# EAGLE board Controller SMD UNO v1.0 (EAGLE 6.4)
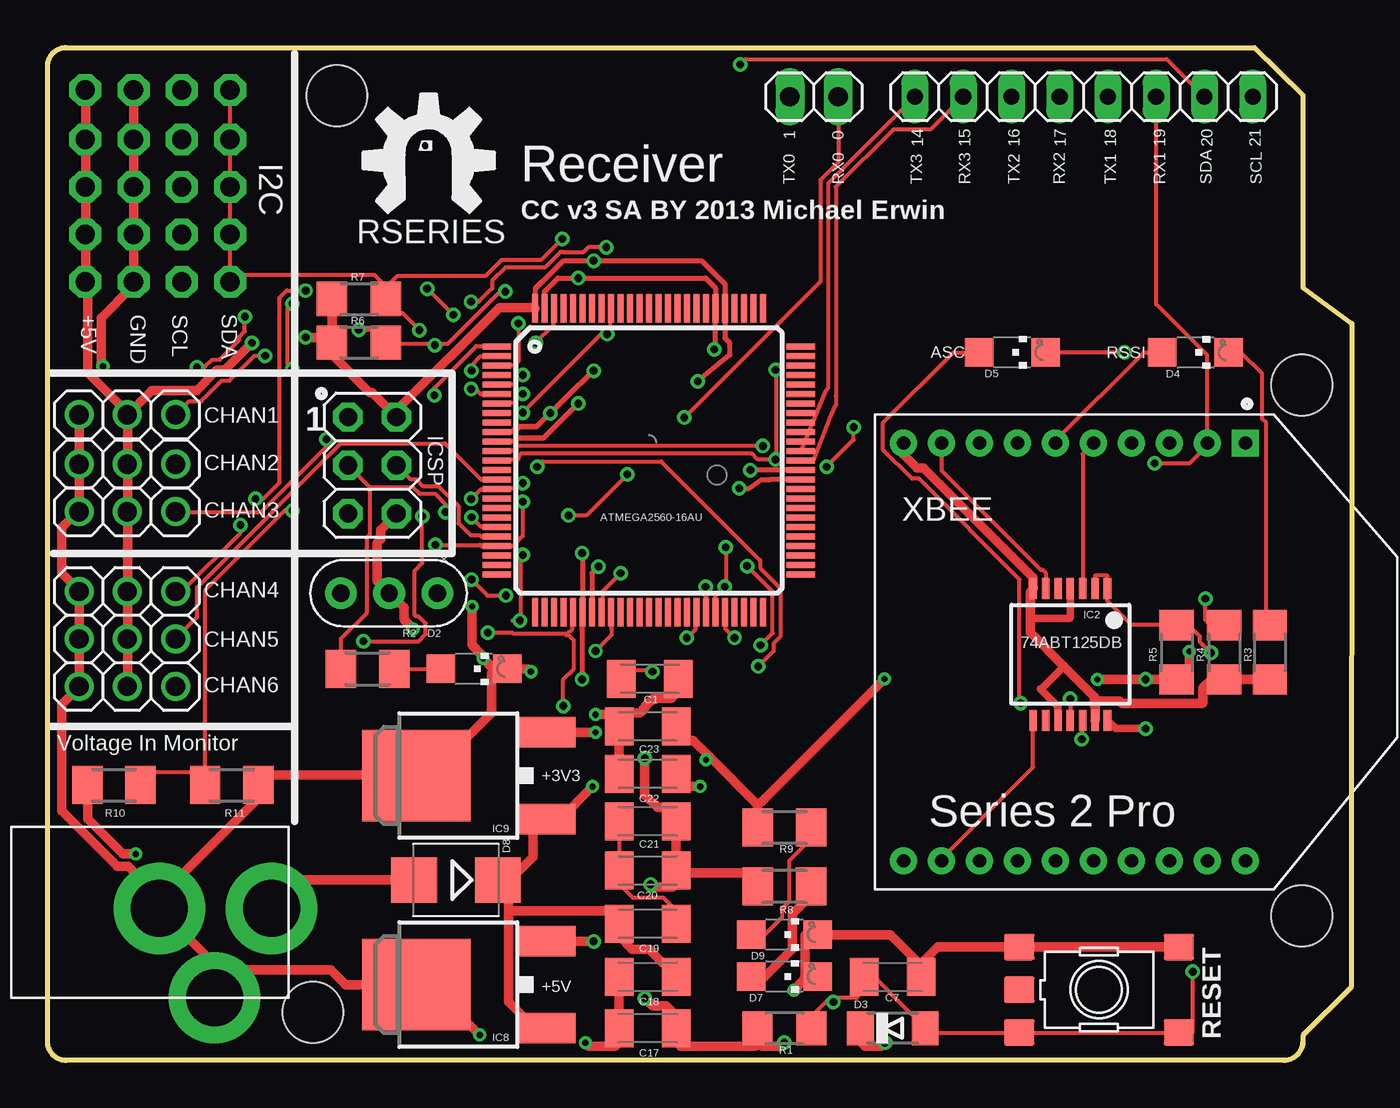
[diagram p0: board, top side]
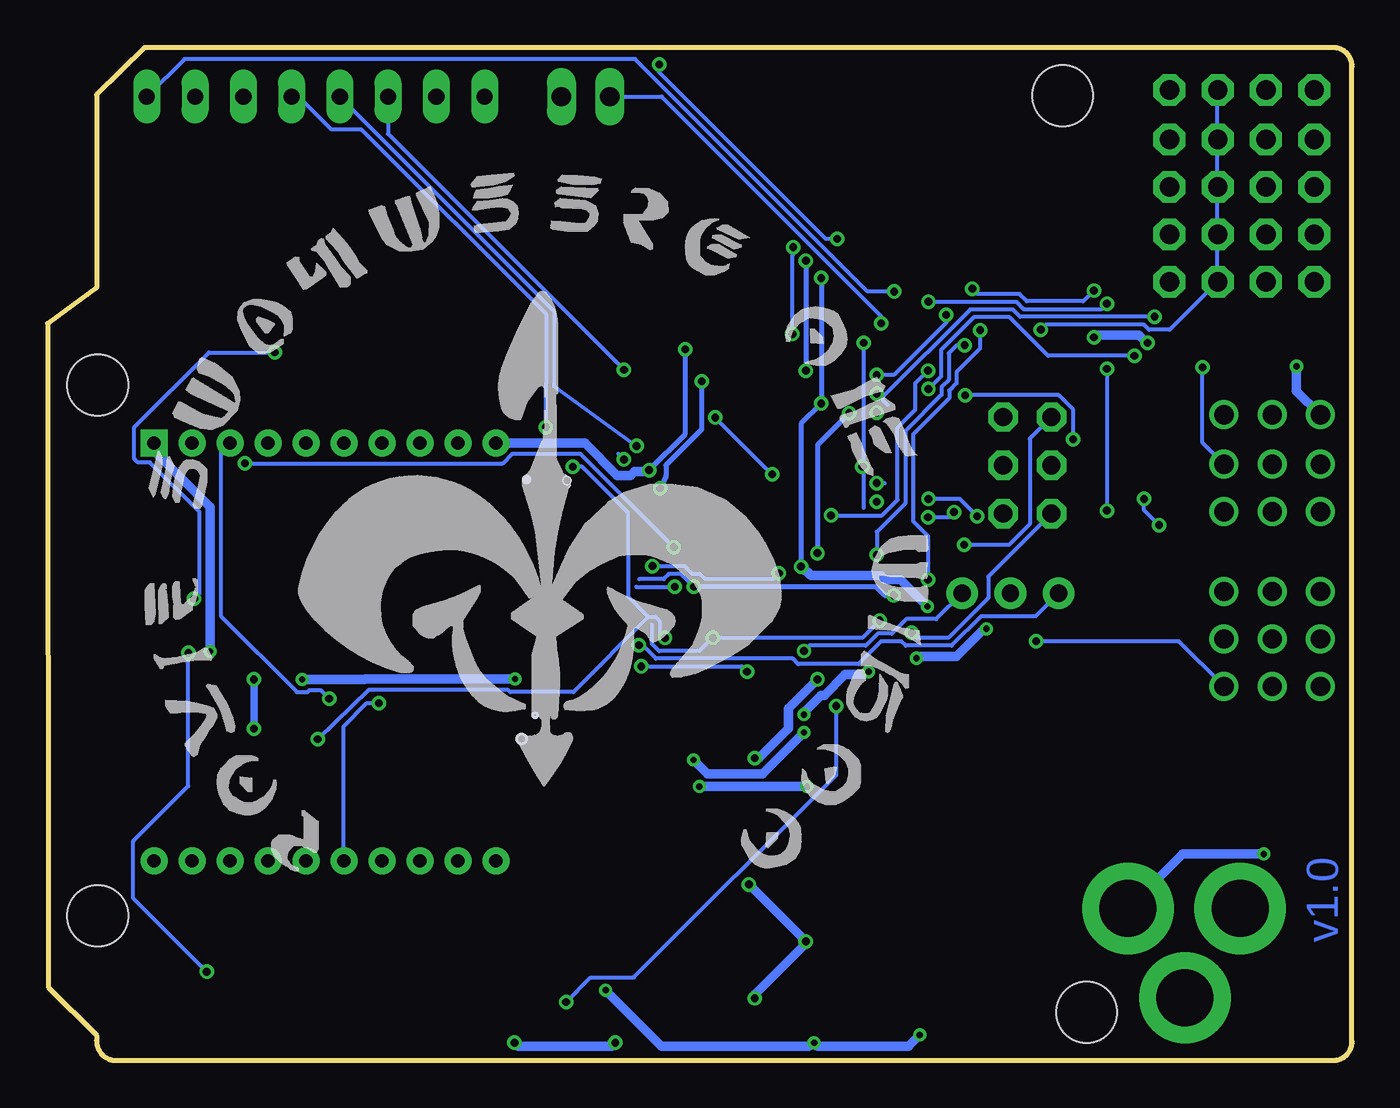
[diagram p1: board, bottom side, seen from below]

Size 68.68 x 53.34 mm. Coordinates in mm from the lower left corner, seen from the top.
Outline: 63.55,53.34 66.09,50.85 66.09,40.69 68.68,38.81 68.63,3.86 66.09,1.32 66.09,1.05 arc-90 65.09,0 1,0 arc-90 0,1 0,52.34 arc-90 1,53.34 63.55,53.34
Copper layers (1*16): Top 0.0356mm / dielectric 1.5011mm / Bottom 0.0356mm
Design rules "LaenPCBOrder *": minimum track width 6mil, minimum drill 13mil, track to track 6mil, track to pad 6mil, pad to pad 6mil, via to via 6mil, smd to smd 6mil, copper to edge 15mil, drill to drill 6mil, minimum pad ring 7mil, minimum via ring 7mil, stop-mask expansion 4mil, vias tented up to drill 16mil, thermal gap 10mil
Net classes: 0 default: width 0.203 mm, drill 0.406 mm, clearance 0.203 mm; 1 supply: width 0.508 mm, drill 0.152 mm, clearance 0.152 mm; 2 GND: width 0.508 mm, drill 0.305 mm, clearance 0.152 mm; 3 power usb: width 0.508 mm, drill 0.406 mm, clearance 0.203 mm
Holes 3.2 mm at 15.24,50.8 13.97,2.54 66.04,35.56 66.04,7.62

## Footprints (pad centres in the part's own frame; a part is rotated, then mirrored left to right if it is on the bottom)
C1206K = smd 1.5 x 2: 1 -1.5,0; 2 1.5,0
1X03 = drill 1.016: 1 -2.54,0; 2 0,0; 3 2.54,0
1X08 = drill 0.85 pad 1.422 long: 1 -8.89,0; 2 -6.35,0; 3 -3.81,0; 4 -1.27,0; 5 1.27,0; 6 3.81,0; 7 6.35,0; 8 8.89,0
CHIPLED_1206 = smd 1.5 x 1.5: A 0,-1.75; C 0,1.75
MINIMELF = smd 1.4 x 1.8: A 1.7,0; C -1.7,0
SMB = smd 2.4 x 2.4: A 2.2,0; C -2.2,0
1X04-CB = drill 1.016 pad 1.676 octagon: 1 -3.81,0; 2 -1.27,0; 3 1.27,0; 4 3.81,0
SSOP14 = smd 0.4 x 1.1: 1 -1.95,-3.475; 2 -1.3,-3.475; 3 -0.65,-3.475; 4 0,-3.475; 5 0.65,-3.475; 6 1.3,-3.475; 7 1.95,-3.475; 8 1.95,3.475; 9 1.3,3.475; 10 0.65,3.475; 11 0,3.475; 12 -0.65,3.475; 13 -1.3,3.475; 14 -1.95,3.475
TQFP100 = smd 1.5 x 0.3: 1 -8,6; 2 -8,5.5; 3 -8,5; 4 -8,4.5; 5 -8,4; 6 -8,3.5; 7 -8,3; 8 -8,2.5; 9 -8,2; 10 -8,1.5; 11 -8,1; 12 -8,0.5; 13 -8,0; 14 -8,-0.5; 15 -8,-1; 16 -8,-1.5; 17 -8,-2; 18 -8,-2.5; 19 -8,-3; 20 -8,-3.5; 21 -8,-4; 22 -8,-4.5; 23 -8,-5; 24 -8,-5.5; 25 -8,-6; 51 8,-6; 52 8,-5.5; 53 8,-5; 54 8,-4.5; 55 8,-4; 56 8,-3.5; 57 8,-3; 58 8,-2.5; 59 8,-2; 60 8,-1.5; 61 8,-1; 62 8,-0.5; 63 8,0; 64 8,0.5; 65 8,1; 66 8,1.5; 67 8,2; 68 8,2.5; 69 8,3; 70 8,3.5; 71 8,4; 72 8,4.5; 73 8,5; 74 8,5.5; 75 8,6 | smd 0.3 x 1.5: 26 -6,-8; 27 -5.5,-8; 28 -5,-8; 29 -4.5,-8; 30 -4,-8; 31 -3.5,-8; 32 -3,-8; 33 -2.5,-8; 34 -2,-8; 35 -1.5,-8; 36 -1,-8; 37 -0.5,-8; 38 0,-8; 39 0.5,-8; 40 1,-8; 41 1.5,-8; 42 2,-8; 43 2.5,-8; 44 3,-8; 45 3.5,-8; 46 4,-8; 47 4.5,-8; 48 5,-8; 49 5.5,-8; 50 6,-8; 76 6,8; 77 5.5,8; 78 5,8; 79 4.5,8; 80 4,8; 81 3.5,8; 82 3,8; 83 2.5,8; 84 2,8; 85 1.5,8; 86 1,8; 87 0.5,8; 88 0,8; 89 -0.5,8; 90 -1,8; 91 -1.5,8; 92 -2,8; 93 -2.5,8; 94 -3,8; 95 -3.5,8; 96 -4,8; 97 -4.5,8; 98 -5,8; 99 -5.5,8; 100 -6,8
DPAK = smd 1.6 x 3: 1 -2.28,-5.31; 3 2.28,-5.31 | smd 4.826 x 5.715: 4 0,1.588
2X03 = drill 0.95 pad 1.55 octagon: 1 -2.54,-1.27; 2 -2.54,1.27; 3 0,-1.27; 4 0,1.27; 5 2.54,-1.27; 6 2.54,1.27
PJ-102A = drill 3 pad 4.8: RING 0.1,-3.39; RING_SW -4.6,-6.29; TIP 0.1,-9.29
1X02 = drill 1.016 long: 1 -1.27,0; 2 1.27,0
R1206 = smd 1.6 x 1.803: 1 -1.422,0; 2 1.422,0
M1206 = smd 1.6 x 2: 1 -1.4,0; 2 1.4,0
TS42 = smd 1.6 x 1.4: 1 -4.2,2.25; 2 4.2,2.25; 3 -4.2,-2.25; 4 4.2,-2.25; 5 -4.2,0
CERM_OSC = drill 0.9 pad 1.676: P$1 -2.54,0; P$2 0,0; P$3 2.54,0
XBEE = drill 0.7 pad 1.422 square: 1 -11,5.5 | drill 0.7 pad 1.422: 2 -11,3.5; 3 -11,1.5; 4 -11,-0.5; 5 -11,-2.5; 6 -11,-4.5; 7 -11,-6.5; 8 -11,-8.5; 9 -11,-10.5; 10 -11,-12.5; 11 11,-12.5; 12 11,-10.5; 13 11,-8.5; 14 11,-6.5; 15 11,-4.5; 16 11,-2.5; 17 11,-0.5; 18 11,1.5; 19 11,3.5; 20 11,5.5

## Placement (x,y rotation side)
C1  0.1uF  [C1206K]  31.7,20.1 0 top
C7  22p  [C1206K]  44.5,4.4 0 top
C17  0.1uF  [C1206K]  31.6,1.7 180 top
C18  0.1uF  [C1206K]  31.6,4.4 180 top
C19  10uf 25V  [C1206K]  31.6,7.2 0 top
C20  10uf 25V  [C1206K]  31.6,10 180 top
C21  0.1uF  [C1206K]  31.6,12.6 180 top
C22  10uf 25V  [C1206K]  31.6,15.1 180 top
C23  0.1uF  [C1206K]  31.6,17.6 180 top
CHAN1  [1X03]  4.2,34 180 top
CHAN2  [1X03]  4.2,31.4 180 top
CHAN3  [1X03]  4.2,28.9 180 top
CHAN4  [1X03]  4.2,24.7 180 top
CHAN5  [1X03]  4.2,22.2 180 top
CHAN6  [1X03]  4.2,19.7 180 top
COMMUNICATION  8x1F-H8.5  [1X08]  54.56,50.75 180 top
D2  RED  [CHIPLED_1206]  22.45,20.62 270 top
D3  CD1206-S01575  [MINIMELF]  44.5,1.7 0 top
D4  [CHIPLED_1206]  60.44,37.28 270 top
D5  [CHIPLED_1206]  50.79,37.3 270 top
D7  [CHIPLED_1206]  38.8,4.43 270 top
D8  [SMB]  21.5,9.5 180 top
D9  [CHIPLED_1206]  38.8,6.64 270 top
I2C  [1X04-CB]  5.8,51.1 180 top
I2C1  [1X04-CB]  5.8,48.5 180 top
I2C2  [1X04-CB]  5.8,46 180 top
I2C3  [1X04-CB]  5.8,43.5 180 top
I2C4  [1X04-CB]  5.8,41 180 top
IC2  74ABT125DB  [SSOP14]  53.85,21.39 180 top
IC3  ATMEGA2560-16AU  [TQFP100]  31.66,31.59 0 top
IC8  LM2931_FIXED  [DPAK]  21,4 90 top
IC9  LM2931_FIXED  [DPAK]  21,15 90 top
ICSP  3x2M  [2X03]  17.1,31.34 270 top
J2  2.1MMJACK  [PJ-102A]  2.5,7.9 90 top
JP1  [1X02]  40.35,50.75 180 top
R1  10K  [R1206]  38.8,1.7 0 top
R2  1.0 K  [M1206]  16.85,20.62 180 top
R3  1K  [R1206]  64.35,21.49 90 top
R4  1K  [R1206]  61.95,21.49 90 top
R5  10K  [R1206]  59.45,21.49 90 top
R6  10K  [R1206]  16.4,37.8 180 top
R7  10K  [R1206]  16.4,40.1 180 top
R8  1.0 K  [M1206]  38.8,9.16 0 top
R9  1.0 K  [M1206]  38.8,12.27 0 top
R10  47.0 K  [M1206]  3.5,14.5 180 top
R11  24.0 K  [M1206]  9.7,14.5 180 top
RESET  TS42031-160R-TR-7260  [TS42]  55.37,3.73 0 top
U$1  ROYAL-ENGINEERS-OF-NABOO  [ROYAL-ENGINEERS-OF-NABOO]  63.96,8.64 0 bottom
U$3  RSERIES-OSHW-LOGO  [RSERIES-OSHW-LOGO-LARGE]  20.07,47.4 0 top
X1  16.00MHz  [CERM_OSC]  17.99,24.61 0 top
XBEE  XBEE  [XBEE]  57.58,21.52 270 top

## Library data of the parts
C1 C17 C18 C21 C23 D2 D4 D5 D7 D9 J2 R2 R8-R11 = minimidi
C7 COMMUNICATION IC3 ICSP RESET = SmartPrj
C19 C20 C22 = rcl
CHAN1-CHAN6 = adafruit3
D3 D8 = diode
I2C I2C1-I2C4 = carduino
IC2 = 74xx-us
IC8 IC9 = SparkFun-PowerIC
JP1 = pinhead
R1 R3-R7 = rcl-ez
U$1 U$3 = rseries
X1 = digg
XBEE = ulink

## Nets
5-GND: RESET.5
+5V [power usb]: C17.1 C20.1 C21.1 CHAN1.2 CHAN2.2 CHAN3.2 CHAN4.2 CHAN5.2 CHAN6.2 D3.C I2C1.4 I2C2.4 I2C3.4 I2C4.4 I2C.4 IC3.10 IC3.31 IC3.61 IC3.80 IC3.100 IC8.3 ICSP.2 R1.1 R6.2 R7.2 R8.1
+9V [supply]: C18.1 C19.1 C22.1 D8.C IC8.1 IC9.1
ADC0: IC3.97
ADC1: IC3.96
ADC2: IC3.95
ADC3: IC3.94
ADC4: IC3.93
ADC5: IC3.92 R10.1 R11.2
ADC6: IC3.91
ADC7: IC3.90
ADC8: IC3.89
ADC9: IC3.88
ADC10: IC3.87
ADC11: IC3.86
ADC12: IC3.85
ADC13: IC3.84
ADC14: IC3.83
ADC15: IC3.82
AREF: C1.1 IC3.98
GND [GND]: C1.2 C7.2 C17.2 C18.2 C22.2 C23.2 CHAN1.3 CHAN2.3 CHAN3.3 CHAN4.3 CHAN5.3 CHAN6.3 D2.C D7.C D9.C I2C1.3 I2C2.3 I2C3.3 I2C4.3 I2C.3 IC2.4 IC2.7 IC2.10 IC2.13 IC3.11 IC3.32 IC3.62 IC3.81 IC3.99 IC8.4 IC9.4 ICSP.6 J2.RING J2.RING_SW R3.1 R4.1 R11.1 RESET.1 RESET.2 X1.P$2 XBEE.10
N$4: IC2.11 XBEE.3
N$5: D5.C R4.2
N$6: IC2.5
N$7: D4.A XBEE.6
N$8: D4.C R3.2
N$9: D9.A R9.2
N$10: IC2.6 XBEE.9
N$11: D2.A R2.1
N$13: IC2.3 XBEE.5
N$21: IC2.9
N$22: IC2.8 XBEE.12
N$23: D5.A XBEE.15
N$28 [supply]: D7.A R8.2
N$29 [supply]: D8.A J2.TIP R10.2
N$30: C19.2 C20.2 C21.2
PA0: IC3.78
PA1: IC3.77
PA2: IC3.76
PA3: IC3.75
PA4: IC3.74
PA5: IC3.73
PA6: IC3.72
PA7: IC3.71
PB0: IC3.19
PB1: IC3.20 ICSP.3 R2.2
PB2: IC3.21 ICSP.4
PB3: IC3.22 ICSP.1
PB4: IC3.23
PB5: IC3.24
PB6: IC3.25
PB7: IC3.26
PC0: IC3.53
PC1: IC3.54
PC2: IC3.55
PC3: IC3.56
PC4: IC3.57
PC5: IC3.58
PC6: IC3.59
PC7: IC3.60
PD7: IC3.50
PE0: IC3.2 JP1.1
PE1: IC3.3 JP1.2
PE3: CHAN4.1 IC3.5
PE4: CHAN1.1 IC3.6
PE5: CHAN2.1 IC3.7
PG0: IC3.51
PG1: IC3.52
PG2: IC3.70
PG5: CHAN3.1 IC3.1
PH3: CHAN5.1 IC3.15
PH4: CHAN6.1 IC3.16
PH5: IC3.17
PH6: IC3.18
PL0: IC3.35
PL1: IC3.36
PL2: IC3.37
PL3: IC3.38
PL4: IC3.39
PL5: IC3.40
PL6: IC3.41
PL7: IC3.42
RESET: C7.1 D3.A IC2.1 IC2.2 IC3.30 ICSP.5 R1.2 R5.2 RESET.3 RESET.4
RTS: XBEE.16
RXD1: COMMUNICATION.3 IC3.45 XBEE.2
RXD2: COMMUNICATION.5 IC3.12
RXD3: COMMUNICATION.7 IC3.63
SCL: COMMUNICATION.1 I2C1.2 I2C2.2 I2C3.2 I2C4.2 I2C.2 IC3.43 R6.1
SDA: COMMUNICATION.2 I2C1.1 I2C2.1 I2C3.1 I2C4.1 I2C.1 IC3.44 R7.1
TXD1: COMMUNICATION.4 IC2.12 IC3.46
TXD2: COMMUNICATION.6 IC3.13
TXD3: COMMUNICATION.8 IC3.64
VCC [supply]: C23.1 IC2.14 IC9.3 R5.1 R9.1 XBEE.1
XTAL1: IC3.34 X1.P$3
XTAL2: IC3.33 X1.P$1

## Tracks (layer width: path | path; a pad name or v marks a point on that pad's centre or on a via)
+5V  (via drill 0.41)
  Top 0.203: IC3.10 24.46,33.09 24.49,33.12
  Top 0.254: IC3.61 38.02,30.58 37.59,30.58 36.93,30.12 v36.42,30.12 | v34.24,35.76 34.59,36.07 35.92,37.13 35.92,37.8 35.66,38.05 IC3.80 35.66,40.89 34.44,42.11 v28.75,42.11 | 25.7,39.63 IC3.100 25.7,39.63 | 25.7,39.63 25.7,40.64 | 25.7,40.64 25.7,40.69 27.18,42.11 | 27.18,42.11 27.23,42.11 | 27.23,42.11 v28.75,42.11 | 25.7,39.63 25.7,40.64 | 25.7,40.64 27.18,42.11 | 27.18,42.11 27.23,42.11 | 27.23,42.11 v28.75,42.11 | v28.75,36.32 25.76,33.38 | 25.76,33.38 24.84,33.38 24.56,33.09 | 24.49,33.12 24.74,33.38 25.76,33.38 | 25.76,33.38 v26.47,34.09 | v28.14,26.72 28.16,26.7 IC3.31 28.14,23.57 28.14,22.71 v28.14,20.07
  Top 0.508: I2C.4 2.01,51.08 2.01,48.74 I2C1.4 2.01,48.49 2.01,46.25 I2C2.4 2.01,46 2.01,43.74 I2C3.4 2.01,43.48 2.01,41.02 I2C4.4 2.11,40.77 2.11,36.22 4.09,34.24 CHAN1.2 | CHAN6.2 4.22,19.71 4.22,22.2 CHAN5.2 4.22,22.45 4.22,24.69 CHAN4.2 4.22,24.94 4.22,28.65 CHAN3.2 4.22,28.91 4.22,31.39 CHAN2.2 4.22,31.65 4.22,33.98 CHAN1.2 | R6.2 14.99,37.82 14.99,40.08 R7.2 | R6.2 14.99,37.54 14.99,37.16 16.97,35.18 17.09,35.18 18.39,33.88 ICSP.2 18.39,34.24 23.8,39.65 25.55,39.65 IC3.100 | v44.09,0.94 43.92,0.76 43.03,0.76 42.8,0.99 42.8,1.68 D3.C | v38.79,0.94 38.61,0.76 37.62,0.76 37.44,0.94 | 37.44,0.94 37.39,0.99 37.39,1.68 R1.1 | 37.44,0.94 37.26,0.76 33.33,0.76 33.1,0.99 33.1,1.68 C17.1 33.1,1.96 33.1,2.34 32.56,2.87 31.85,2.87 v31.45,3.28 | C20.1 C21.1 33.1,12.85 33.1,13.31 33.07,13.34 32.11,13.34 31.45,13.99 v31.45,15.93 | R8.1 37.39,9.8 37.31,9.88 33.33,9.88 C20.1 | v28.75,6.27 IC8.3 | v31.75,9.27 31.88,9.14 32.94,9.14 33.1,9.3 33.1,9.73 C20.1 | v10.77,37.8 9.32,36.35 8.91,36.35 7.85,35.28 5.49,35.28 4.57,34.37 4.32,34.37 CHAN1.2 | v13.59,38.08 14.76,38.08 R6.2
  Bottom 0.254: v34.24,35.76 34.24,33.22 36.12,31.34 36.12,30.79 v36.42,30.12 | v28.75,42.11 v28.75,36.32 | v26.47,34.09 28.14,32.41 v28.14,26.72
  Bottom 0.508: v44.09,0.94 43.92,0.76 38.96,0.76 v38.79,0.94 | v31.75,9.27 v28.75,6.27 28.88,6.04 31.45,3.48 v31.45,3.28 | v28.14,20.07 29.67,18.54 29.67,17.48 31.22,15.93 v31.45,15.93 | v10.77,37.8 10.82,37.8 11.23,38.2 13.46,38.2 v13.59,38.08
+9V  (via drill 0.33)
  Top 0.508: C18.1 33.1,4.42 33.1,5.11 33.07,5.13 32.41,5.13 31.67,5.87 30.79,5.87 30.1,6.55 30.1,7.19 C19.1 30.1,7.44 30.1,7.85 30.07,7.87 24.51,7.87 24.28,7.87 | v34.37,14.43 33.12,14.43 33.1,14.45 33.1,15.09 C22.1 | v28.7,14.43 27,12.72 IC9.1 26.06,12.72 25.6,12.72 25.58,12.7 25.58,10.72 24.36,9.5 23.72,9.5 D8.C 24.28,9.27 24.28,7.87 | 24.28,7.87 24.28,3.1 25.65,1.73 26.29,1.73 IC8.1
  Bottom 0.508: v28.7,14.43 v34.37,14.43
ADC5  (via drill 0.41)
  Top 0.203: v25.02,34.11 29.31,38.41 | 29.31,38.41 29.64,38.73 29.64,38.94 29.67,38.96 29.67,39.57 IC3.92 | R10.1 4.9,15.14 4.93,15.16 8.28,15.16 8.31,15.14 R11.2 8.28,15.24 8.28,24.74 12.5,28.96 v12.9,28.96 | v12.9,36.42 12.62,36.7 12.62,39.57 v12.9,39.85 | v22.3,39.95 22.71,39.95 23.42,40.66 23.42,41.07 24.11,41.76 26.19,41.76 27,42.57 27.18,42.57 27.2,42.55 28.19,42.55 28.47,42.82 v29.41,42.82 | v29.46,38.25 29.36,38.35 29.31,38.41
  Bottom 0.203: v12.9,36.42 v12.9,28.96 | v12.9,39.85 13.18,39.57 17.3,39.57 17.68,39.95 v22.3,39.95 | v29.41,42.82 29.41,42.44 29.46,42.39 v29.46,38.25
AREF  (via drill 0.41)
  Top 0.203: v25.7,37.8 26.64,38.73 26.64,38.94 26.67,38.96 26.67,39.57 IC3.98 | v31.85,20.47 31.77,20.55 30.2,20.55 30.2,20.12 C1.1 | v37.41,20.75 38.23,21.57 38.23,21.97 38.58,22.33 38.58,24.87 37.52,25.93 37.52,26.34 32.31,31.55 26.06,31.55 v25.78,31.27
  Bottom 0.203: 25.7,29.11 25.7,31.27 | 25.7,31.27 v25.7,37.8 | v31.85,20.47 32.13,20.75 v37.41,20.75 | v25.78,31.27 25.7,31.27
GND  (via drill 0.33, 0.41)
  Top 0.203: IC3.11 24.41,32.59 24.43,32.61
  Top 0.254: IC3.62 v37.01,31.09 | v35.1,37.44 35.16,37.5 IC3.81 35.16,40.68 34.65,41.2 v27.94,41.2 | IC3.99 | IC3.99 26.16,40.49 | 26.16,40.49 26.87,41.2 | 26.87,41.2 v27.94,41.2 | IC3.99 26.16,40.49 | 26.16,40.49 26.87,41.2 | 26.87,41.2 v27.94,41.2 | 26.11,32.77 v27.94,34.59 26.11,32.77 | 26.11,32.77 26.01,32.77 | 26.01,32.77 24.89,32.77 24.74,32.77 | 24.74,32.77 24.59,32.61 | 24.59,32.61 24.57,32.59 | 24.43,32.61 24.59,32.61 | 24.59,32.61 24.74,32.77 | 24.74,32.77 26.01,32.77 | 26.01,32.77 26.11,32.77 | v29.01,26.01 28.66,25.67 IC3.32
  Top 0.406: IC2.10 53.2,18.63 52.27,19.56 52.32,19.56 53.52,20.75 | IC2.4 53.85,23.32 53.8,23.27 51.79,23.27 51.74,23.32
  Top 0.508: C18.2 C17.2 30.1,1.45 30.1,0.99 29.87,0.76 28.5,0.76 v28.32,0.94 | v22.76,1.35 20.12,3.99 19.43,3.99 IC8.4 19.18,3.99 15.7,3.99 14.91,4.78 9.02,4.78 J2.RING_SW 8.79,5.08 5.89,7.98 J2.RING | 39.9,4.42 40.54,4.42 D7.C | 39.9,4.42 39.88,4.45 39.88,6.6 39.9,6.63 40.54,6.63 D9.C 40.79,6.63 44.37,6.63 45.77,5.23 C7.2 46,4.42 46,5.11 46.89,5.99 51.16,5.99 RESET.1 51.41,5.99 59.56,5.99 RESET.2 | v39.29,3.71 39.78,4.19 39.9,4.42 | R3.1 64.34,20.07 R4.1 61.7,20.07 61.29,20.07 60.83,19.61 60.83,18.82 60.81,18.8 56.57,18.8 56.44,18.92 55.35,18.92 55.12,18.92 | IC2.7 | IC2.7 51.89,25.12 51.89,25.43 46.13,31.19 45.77,31.19 45.06,31.9 45.06,32.51 XBEE.10 | 55.12,18.92 55.12,19.15 53.52,20.75 51.74,22.53 51.74,23.32 51.74,24.66 IC2.7 | 55.12,18.92 55.12,18.69 55.17,18.64 55.17,17.93 IC2.13 | I2C.3 4.55,51.08 4.55,48.74 I2C1.3 4.55,48.49 4.55,46.25 I2C2.3 4.55,46 4.55,43.74 I2C3.3 4.55,43.48 4.55,41.02 I2C4.3 4.47,40.74 2.82,39.09 2.82,36.65 v2.92,36.55 | CHAN1.3 1.68,33.98 1.68,31.65 CHAN2.3 1.68,31.39 1.68,28.91 CHAN3.3 1.45,28.75 0.76,28.07 0.76,25.68 1.52,24.92 CHAN4.3 1.68,24.69 1.68,22.45 CHAN5.3 1.68,22.2 1.68,19.71 CHAN6.3 1.5,19.48 0.76,18.75 0.76,13.13 3.68,10.21 4.24,10.21 5.66,8.79 5.74,8.79 J2.RING | ICSP.6 18.36,28.78 17.53,27.94 17.53,27.43 17.35,27.25 17.35,25.25 X1.P$2 18.19,24.43 18.77,23.85 18.77,23.22 v19.25,22.73 | v25.45,20.47 25.3,20.62 D2.C 23.95,20.62 23.5,20.62 | v28.85,18.21 30.07,18.21 30.1,18.19 C23.2 | C22.2 30.1,15.11 30.1,17.35 C23.2 | C1.2 33.2,19.46 32.82,19.07 31.9,19.07 31.47,18.64 31.47,18.59 31.19,18.31 30.33,18.31 C23.2
  Top 0.508: 23.5,20.62 v22.94,21.18 22.81,21.41 22.35,21.87 v22.35,23.9 | 23.5,20.62 23.37,20.4 23.37,18.31 20.07,15.01 19.66,15.01 IC9.4 18.72,15.01 18.69,15.04 11.1,15.04 R11.1 11.1,14.25 11.1,13.79 5.97,8.66 5.97,8.26 J2.RING
  Bottom 0.254: v37.01,31.09 35.1,32.99 v35.1,37.44 | v27.94,41.2 v27.94,34.59 29.01,33.53 v29.01,26.01
  Bottom 0.508: v22.76,1.35 23.34,0.76 28.14,0.76 v28.32,0.94 28.55,0.81 28.6,0.76 36.35,0.76 v39.29,3.71 | v37.01,31.09 37.11,31.01 37.77,31.01 37.97,30.81 38.68,30.81 40.39,32.51 45.06,32.51 XBEE.10 | v2.92,36.55 2.92,35.26 1.68,34.01 CHAN1.3 | v25.45,20.47 25.58,20.47 25.73,20.32 26.7,20.32 27.79,19.23 27.96,19.23 28.85,18.34 v28.85,18.21 | v19.25,22.73 19.38,22.73 20.83,21.29 22.84,21.29 v22.94,21.18 | v22.35,23.9 23.77,25.32 24.59,25.32 24.79,25.53 28.5,25.53 28.91,25.93 v29.01,26.01
N$4  (via drill 0.41)
  Top 0.203: v53.85,19.05 53.85,17.93 IC2.11
  Bottom 0.203: v53.85,19.05 54.3,19.51 54.89,19.51 54.99,19.41 55.55,19.41 59.56,23.42 59.56,32.03 XBEE.3
N$5  (via drill 0.41)
  Top 0.203: v56.72,37.29 52.55,37.29 D5.C | v60.96,24.31 60.96,23.19 61.24,22.91 61.92,22.91 R4.2
  Bottom 0.203: v56.72,37.29 60.17,37.29 64.11,33.35 64.11,31.67 63.93,31.5 63.3,31.5 60.68,28.88 60.68,24.59 v60.96,24.31
N$7
  Top 0.203: D4.A 58.67,37.29 57.71,37.29 53.09,32.66 53.09,32.54 XBEE.6
N$8
  Top 0.203: D4.C 62.2,37.29 62.84,37.29 63.96,36.17 63.96,33.78 64.16,33.58 64.16,22.91 64.34,22.91 R3.2
N$9
  Top 0.203: D9.A 37.06,6.63 37.74,6.63 38.66,7.54 38.66,7.98 39.04,8.36 39.04,10.52 40.06,11.53 40.18,11.53 40.21,11.56 40.21,12.24 R9.2
N$10
  Top 0.203: IC2.6 52.55,25.68 52.4,25.83 52.3,25.83 47.07,31.06 47.07,32.51 XBEE.9
N$11
  Top 0.203: D2.A 18.29,20.62 18.26,20.65 18.24,20.62 R2.1
N$13
  Top 0.203: IC2.3 54.51,31.95 55.07,32.51 XBEE.5
N$22
  Top 0.203: IC2.8 51.89,15.44 47.09,10.64 47.09,10.52 XBEE.12
N$23  (via drill 0.41)
  Top 0.203: v51.23,18.82 51.18,18.87 51.18,25.32 45.87,30.63 45.52,30.63 43.99,32.16 43.99,33.58 47.7,37.29 49.02,37.29 D5.A
  Bottom 0.203: v51.23,18.82 51.87,18.82 53.09,17.6 XBEE.15
N$28
  Top 0.508: D7.A 37.74,4.42 39.22,5.89 39.22,7.72 39.93,8.43 40.18,8.43 40.21,8.46 40.21,9.14 R8.2
N$29  (via drill 0.33)
  Top 0.508: v4.65,10.87 3.96,10.87 2.11,12.72 2.11,14.48 R10.2 | D8.A 19.28,9.5 13.31,9.5 11.81,8 J2.TIP
  Bottom 0.508: v4.65,10.87 8.91,10.87 J2.TIP
N$30
  Top 0.203: C21.2 C20.2 30.1,9.91 30.1,9.3 30.81,8.59 32.41,8.59 33.1,7.9 33.1,7.21 C19.2
PB1  (via drill 0.41)
  Top 0.203: v22.33,28.6 22.81,28.12 23.01,28.12 23.04,28.09 23.65,28.09 IC3.20 | v20.95,28.88 20.95,29.29 20.4,29.84 19.58,29.84 19.23,30.2 16.97,30.2 | 16.97,30.2 15.85,31.32 ICSP.3 | R2.2 15.44,22.2 16.79,23.55 16.79,27.51 16.97,27.69 16.97,30.12 16.97,30.2
  Bottom 0.203: v22.33,28.6 21.23,28.6 v20.95,28.88
PB2
  Top 0.203: IC3.21 23.65,27.58 22.84,27.58 22.76,27.66 22.28,27.66 21.64,28.3 21.64,29.18 20.57,30.25 19.76,30.25 19.41,30.61 19.1,30.61 18.39,31.32 ICSP.4
PB3  (via drill 0.41)
  Top 0.203: v25.02,29.41 25.02,27.61 24.51,27.1 24.43,27.1 23.67,27.1 IC3.22 23.57,27.1 22.81,27.1 22.76,27.15 v20.42,27.15
  Bottom 0.203: v20.42,27.15 18.06,27.15 16.97,28.25 16.97,32.74 15.85,33.86 ICSP.1
PE0  (via drill 0.41)
  Top 0.203: v22.33,36.32 22.33,36.6 22.81,37.08 23.65,37.08 IC3.2 | v27.43,28.7 28.37,28.7 v30.53,30.86 | v33.53,33.86 40.69,41.02 40.69,46.35 41.63,47.3 JP1.1
  Bottom 0.203: v22.33,36.32 22.99,35.66 22.99,34.27 23.93,33.33 23.93,29.52 24.74,28.7 v27.43,28.7 | v33.53,33.86 v30.53,30.86
PE1  (via drill 0.41)
  Top 0.203: v24.79,38.81 24.79,36.8 24.77,36.78 24.69,36.78 24.51,36.6 23.67,36.6 IC3.3
  Bottom 0.203: v24.79,38.81 24.79,39.19 36.35,50.75 39.06,50.75 JP1.2
PE3  (via drill 0.41)
  Top 0.203: v25.02,36.09 24.51,35.59 23.67,35.59 IC3.5 | v19.99,40.64 v21.36,39.27 | v13.59,40.54 12.6,40.54 12.22,40.16 12.22,30.43 11.35,29.57 v10.95,29.57 | v10.16,28.19 10.16,27.79 7.09,24.71 6.76,24.71 CHAN4.1
  Bottom 0.203: v25.02,36.09 24.13,36.09 21.36,38.86 v21.36,39.27 | v19.99,40.64 19.71,40.36 17.5,40.36 17.12,39.98 14.15,39.98 v13.59,40.54 | v10.95,29.57 10.95,28.98 v10.16,28.19
PE4  (via drill 0.41)
  Top 0.203: v22.3,35.36 22.55,35.36 22.81,35.1 23.65,35.1 IC3.6 | v11.46,37.11 10.9,37.11 9.58,35.79 9.17,35.79 8.1,34.72 7.47,34.72 6.76,34.01 CHAN1.1
  Bottom 0.203: v22.3,35.36 21.64,36.02 21.64,37.41 19.91,39.14 18.03,39.14 16,37.11 v11.46,37.11
PE5  (via drill 0.41)
  Top 0.203: v25.02,35.1 24.54,34.62 24.31,34.62 24.28,34.59 24.21,34.59 23.67,34.59 IC3.7 | v10.39,39.17 10.39,38.41 10.08,38.1 10.08,37.92 9.07,36.91 8.66,36.91 8.26,36.5 v7.87,36.5
  Bottom 0.203: 24.43,34.52 v25.02,35.1 24.71,34.92 20.09,39.55 17.86,39.55 17.48,39.17 v10.39,39.17 | v7.87,36.5 7.87,32.54 6.76,31.42 CHAN2.1
PG5  (via drill 0.41)
  Top 0.203: v20.37,35.03 20.37,35.41 22.58,37.62 23.06,37.62 23.09,37.59 23.65,37.59 IC3.1 | v14.68,32.72 14.68,32.31 11.25,28.88 6.76,28.88 CHAN3.1
  Bottom 0.203: v20.37,35.03 15.44,35.03 14.68,34.27 v14.68,32.72
PH3
  Top 0.203: IC3.15 23.65,30.58 22.84,30.58 20.93,32.49 15.44,32.49 7.87,24.92 7.87,23.34 6.76,22.23 CHAN5.1
PH4  (via drill 0.41)
  Top 0.203: v25.02,30.4 24.82,30.4 24.54,30.12 24.31,30.12 24.28,30.1 24.21,30.1 23.67,30.1 IC3.16 23.57,30.1 23.04,30.1 23.01,30.07 22.81,30.07 v22.3,29.57 | v19.74,28.65 19.74,26.19 19.33,25.78 19.33,23.47 19.41,23.39 19.53,23.39 19.91,23.01 19.91,22.45 19.53,22.07 v16.64,22.07
  Bottom 0.203: 24.61,30.4 v25.02,30.4 | v22.3,29.57 20.65,29.57 v19.74,28.65 | v16.64,22.07 9.12,22.07 6.76,19.71 CHAN6.1
RESET  (via drill 0.41)
  Top 0.203: 27.38,22.48 27.64,22.73 27.64,22.94 27.66,22.96 27.66,23.57 IC3.30 | 27.3,22.48 24.56,22.48 24.49,22.53 v23.19,22.53 | 27.3,22.48 27.38,22.48 | 27.3,22.4 27.3,22.48 | 41.38,3.3 42.6,3.3 43,3.71 C7.1 43,4.5 43,4.85 43.08,4.85 45.52,2.41 46.18,2.41 46.2,2.39 46.2,1.78 D3.A 46.2,1.68 46.2,1.47 51.16,1.47 RESET.3 51.26,1.47 RESET.4 59.66,1.47 60.27,1.47 60.3,1.5 v60.3,4.67 | 41.38,3.3 41.2,3.3 40.23,2.34 40.23,1.7 R1.2 | IC2.2 55.14,25.5 55.17,25.53 55.78,25.53 55.8,25.5 IC2.1 55.8,24.77 55.8,24.21 57.07,22.94 58.73,22.94 58.75,22.91 59.44,22.91 R5.2 59.54,22.91 60.1,22.91 60.68,22.33 60.68,22.05 v61.27,21.46 | v27.15,18.67 27.15,20.07 27.71,20.62 27.71,22.12 27.43,22.4 27.38,22.48 | v41.38,3.07 41.38,3.23 41.38,3.3
  Bottom 0.203: v23.19,22.53 22.91,22.25 21.26,22.25 19.15,24.36 19.15,25.48 15.85,28.78 ICSP.5 | v61.27,21.46 61.27,14.45 64.16,11.56 64.16,8.53 v60.3,4.67 | v27.15,18.67 27.15,15.04 37.82,4.37 40.08,4.37 v41.38,3.07
RXD1  (via drill 0.41)
  Top 0.203: IC3.45 35.15,24.43 v35.66,24.94 35.71,25.02 v35.71,27.03 | v58.29,31.45 60.12,31.45 61.06,32.38 61.06,32.51 XBEE.2 61.06,32.61 61.06,37.13 58.37,39.83 COMMUNICATION.3
  Bottom 0.203: 37.69,24.94 v35.66,24.94 | v35.71,27.03 40.64,31.95 44.2,31.95 44.7,31.45 v58.29,31.45
RXD2  (via drill 0.41)
  Top 0.203: v37.67,32.36 24.77,32.36 24.51,32.11 24.43,32.11 23.67,32.11 IC3.12
  Bottom 0.203: v37.67,32.36 42.01,35.51 42.01,35.61 42.01,39.47 COMMUNICATION.5
RXD3
  Top 0.203: IC3.63 39.67,31.6 40.28,31.6 40.31,31.57 41.15,33.76 41.47,34.45 41.5,34.49 41.5,35 41.5,46 44.53,49.02 46.48,49.02 COMMUNICATION.7
SCL  (via drill 0.41)
  Top 0.203: v33.66,22.25 34.14,22.73 34.14,22.94 34.16,22.96 34.16,23.57 IC3.43 | 24.46,23.16 v24.87,23.16 24.92,23.24 24.92,26.52 v25.02,26.62 | v16.38,38.48 17.8,38.48 17.83,38.46 17.83,37.82 R6.1 17.91,37.74 20.4,37.74 | v24.11,40.49 23.82,40.49 21.08,37.74 20.4,37.74 | v20.4,37.67 20.4,37.74
  Bottom 0.203: v24.87,23.16 25.78,22.25 v33.66,22.25 33.73,22.2 34.37,21.57 36.47,21.57 36.85,21.95 36.85,22.94 | v16.38,38.48 16.1,38.76 10.97,38.76 10.69,38.48 9.6,38.48 7.09,41 I2C4.2 7.09,41.1 7.09,43.48 I2C3.2 7.09,43.59 7.09,46 I2C2.2 7.09,46.1 7.09,48.49 I2C1.2 7.09,48.59 7.09,51.08 I2C.2 | COMMUNICATION.1 61.47,52.73 37.74,52.73 25.5,40.49 v24.11,40.49 | v25.02,26.62 25.02,27.84 23.52,29.34 23.52,33.15 21.61,35.05 21.61,35.46 21.23,35.84 21.23,37.24 20.8,37.67 v20.4,37.67
SDA  (via drill 0.41)
  Top 0.203: 34.39,24.71 34.4,24.7 | 34.4,24.7 34.67,24.43 IC3.44 | v34.65,24.94 34.47,24.77 34.4,24.7 | R7.1 17.83,40.74 17.2,41.38 9.98,41.38 9.63,41.02 I2C4.1 9.93,41.45 9.63,41.76 9.63,43.48 I2C3.1 9.63,43.59 9.63,46 I2C2.1 9.63,46.1 9.63,48.49 I2C1.1 9.63,48.59 9.63,51.08 I2C.1 | COMMUNICATION.2 58.93,52.73 36.75,52.73 v36.47,52.45 | v27.1,43.26 26.01,42.16 23.93,42.16 23.09,41.33 18.44,41.33 17.91,40.79 R7.1 | v24.13,24.49 23.16,24.49 v22.33,25.32 | v19.58,38.46 18.67,39.37 17.86,39.37 17.83,39.4 17.83,40.01 R7.1
  Bottom 0.203: 37.52,25.35 36.25,25.35 35.97,25.63 35.33,25.63 v34.65,24.94 | v36.47,52.45 36.47,52.05 27.69,43.26 v27.1,43.26 | v22.33,25.32 22.33,27.61 23.11,28.4 23.11,32.97 21.21,34.87 21.21,35.28 20.83,35.66 20.83,36.25 19.58,37.49 v19.58,38.46
  Bottom 0.254: v24.13,24.49 24.59,24.49 25.04,24.94 v34.65,24.94
TXD1  (via drill 0.41)
  Top 0.203: v36.17,22.25 35.69,22.73 35.69,22.94 35.66,22.96 35.66,23.57 IC3.46 | v54.46,16.92 IC2.12 | v42.44,33.35 42.44,32.69 v41.02,31.27
  Bottom 0.203: v36.17,22.25 36.45,22.53 36.45,23.11 36.5,23.19 36.65,23.34 37.06,23.34 | v54.46,16.92 51.77,19.51 44.42,19.51 44.32,19.41 41,19.41 37.06,23.34 | COMMUNICATION.4 55.45,50.75 53.72,49.02 52.15,49.02 42.42,39.29 42.42,35.66 42.44,35.64 v42.44,33.35 | v41.02,31.27 40.54,31.27 38.1,28.83 38.1,24.41 37.11,23.42 37.06,23.34
TXD2  (via drill 0.41)
  Top 0.203: IC3.13 23.67,31.6 24.21,31.6 24.28,31.6 24.31,31.62 24.54,31.62 24.56,31.65 24.77,31.65 24.79,31.67 24.79,31.8 24.94,31.95 37.08,31.95 37.39,31.65 v38.33,31.65 38.35,31.73 38.35,36.35 v38.33,36.37
  Bottom 0.203: 38.63,31.95 v38.33,31.65 | v38.33,36.37 50.75,48.79 COMMUNICATION.6
TXD3
  Top 0.203: IC3.64 39.67,32.11 40.97,35.26 41.02,35.31 41.07,35.38 41.1,35.41 41.1,46.18 COMMUNICATION.8
VCC  (via drill 0.33, 0.41)
  Top 0.406: v55.27,20.07 v57.81,20.07 | v57.81,17.48 56.24,17.48 IC2.14
  Top 0.508: v60.12,21.54 60.12,20.09 60.1,20.07 R5.1 59.21,20.07 v57.81,20.07 v55.27,20.07 | 37.39,13.46 R9.1 | 34.85,16 33.98,16.87 33.12,16.87 33.1,16.89 33.1,17.58 C23.1 | 34.85,16 37.39,13.46 | v28.85,17.27 IC9.3 | v34.67,15.82 34.85,16 | 37.39,13.46 37.59,13.61 37.77,13.79 v44.07,20.09
  Bottom 0.406: v57.81,20.07 v57.81,17.48
  Bottom 0.508: v60.12,21.54 60.12,29.13 63.07,32.08 63.07,32.51 XBEE.1 | v28.85,17.27 31.04,15.09 33.93,15.09 v34.67,15.82 | v55.27,20.07 51.99,20.07 51.97,20.09 v44.07,20.09
XTAL1  (via drill 0.41)
  Top 0.203: IC3.34 29.67,23.57 29.67,22.96 29.69,22.94 29.69,22.73 29.72,22.66 29.72,22.43 v28.85,21.57
  Bottom 0.203: v28.85,21.57 28.57,21.84 25.6,21.84 24.97,22.48 24.23,22.48 23.47,23.24 21.89,23.24 20.55,24.59 X1.P$3
XTAL2  (via drill 0.41)
  Top 0.203: v30.18,25.65 29.21,24.69 29.21,23.62 29.18,23.6 IC3.33 | v36.83,26.04 38.18,24.69 38.18,22.5 v37.54,21.87
  Bottom 0.203: v30.18,25.65 30.45,25.38 34.09,25.38 34.34,25.63 34.75,25.63 35.15,26.04 v36.83,26.04 | v37.54,21.87 37.36,21.87 36.65,21.16 29.44,21.16 29.16,20.88 25.98,20.88 24.79,22.07 23.72,22.07 23.5,21.84 21.08,21.84 19.53,23.39 16.66,23.39 15.47,24.59 X1.P$1

## Text on the board
Bottom: v1.0
tPlace: 1 | 0 | 14 | 15 | 16 | 17 | 18 | 19 | 20 | 21 | RSERIES | Voltage In Monitor | Series 2 Pro
tNames: Receiver | TX0 | RX0 | TX3 | RX3 | TX2 | RX2 | TX1 | RX1 | SDA | SCL | CC v3 SA BY 2013 Michael Erwin | +5V | GND | SCL | SDA | ASC | RSSI | 1 | +3V3 | +5V
ReferenceLC: ON | ON